# EAGLE board TEC (EAGLE 8.3.0)
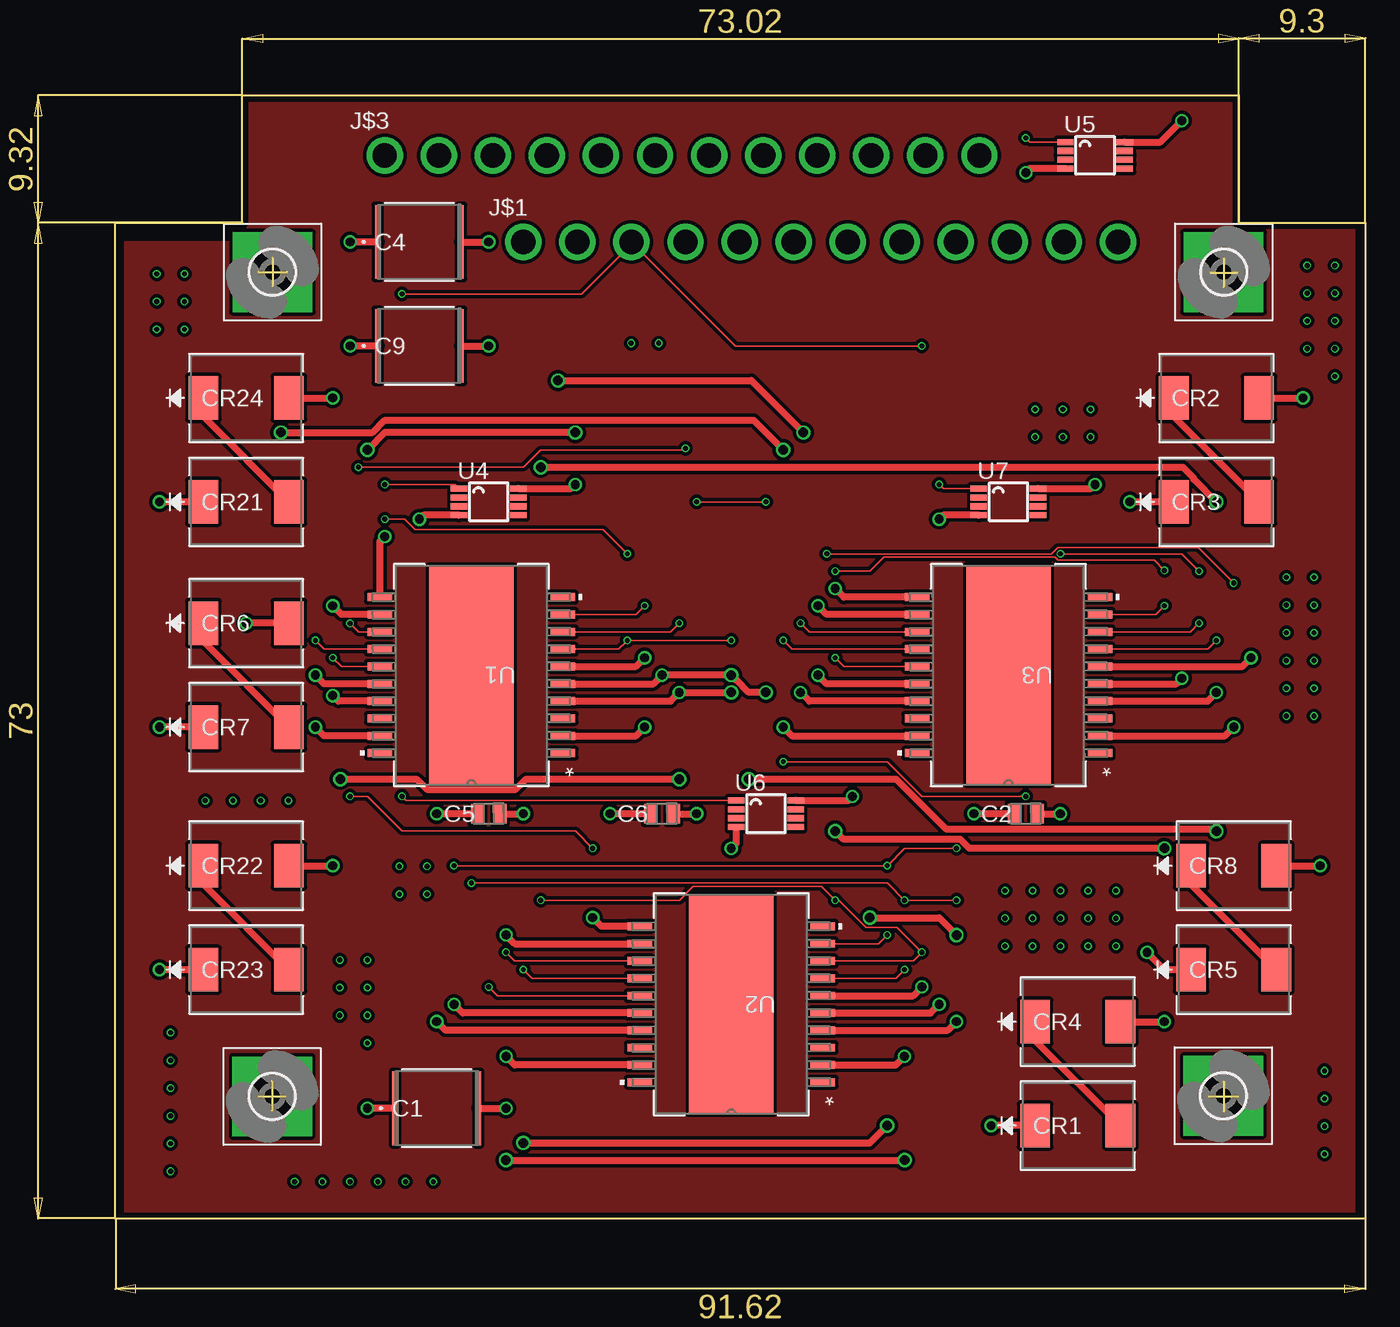
[diagram p0: board, top side]
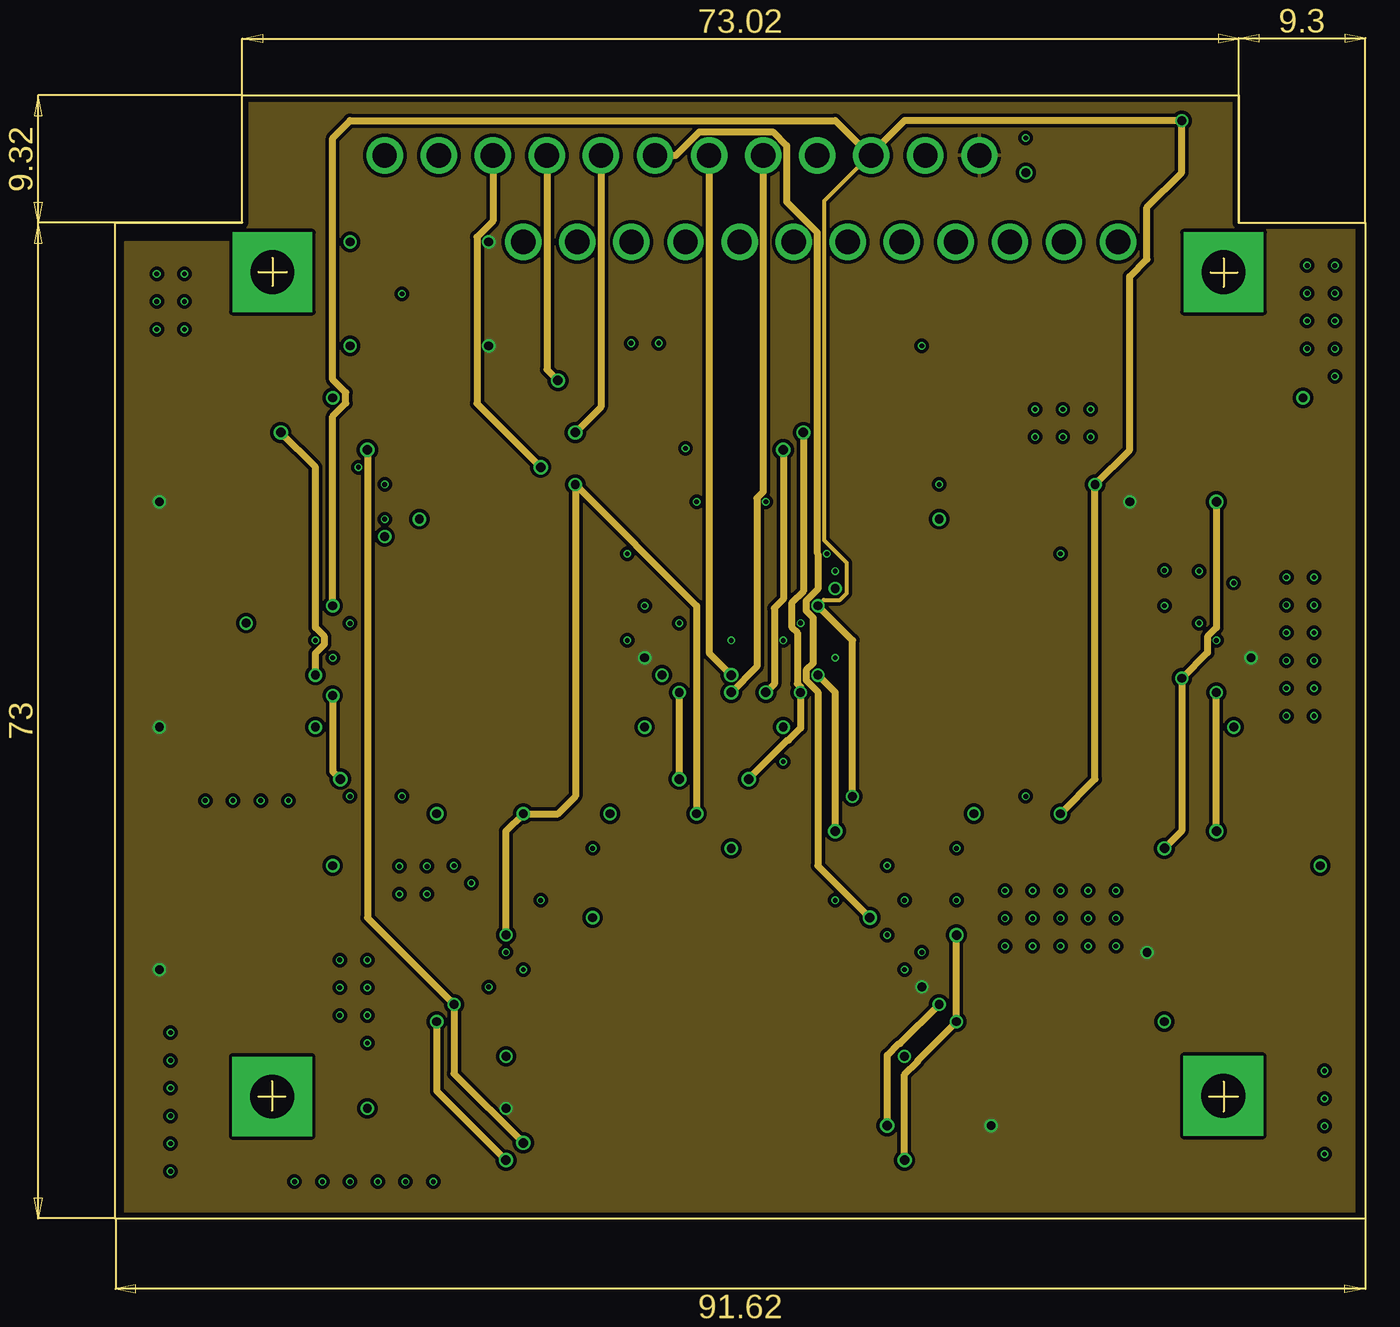
[diagram p1: board, inner layer Route2]
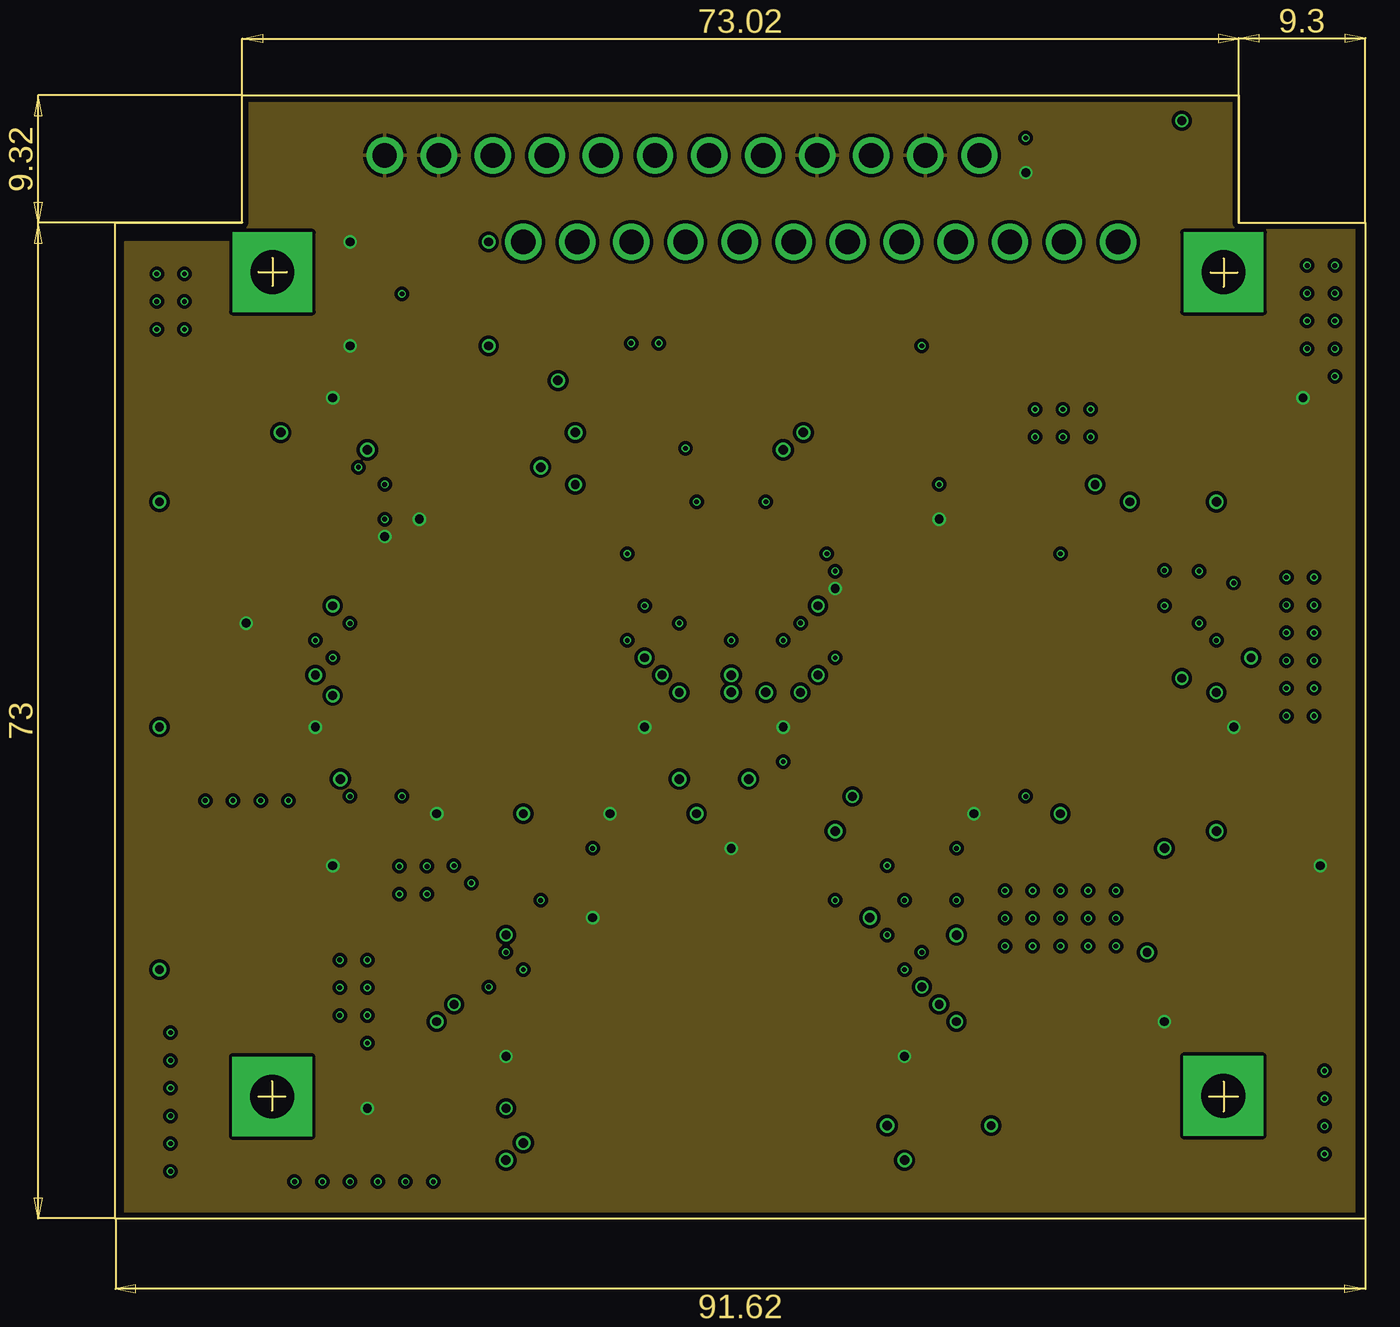
[diagram p2: board, inner layer Route15]
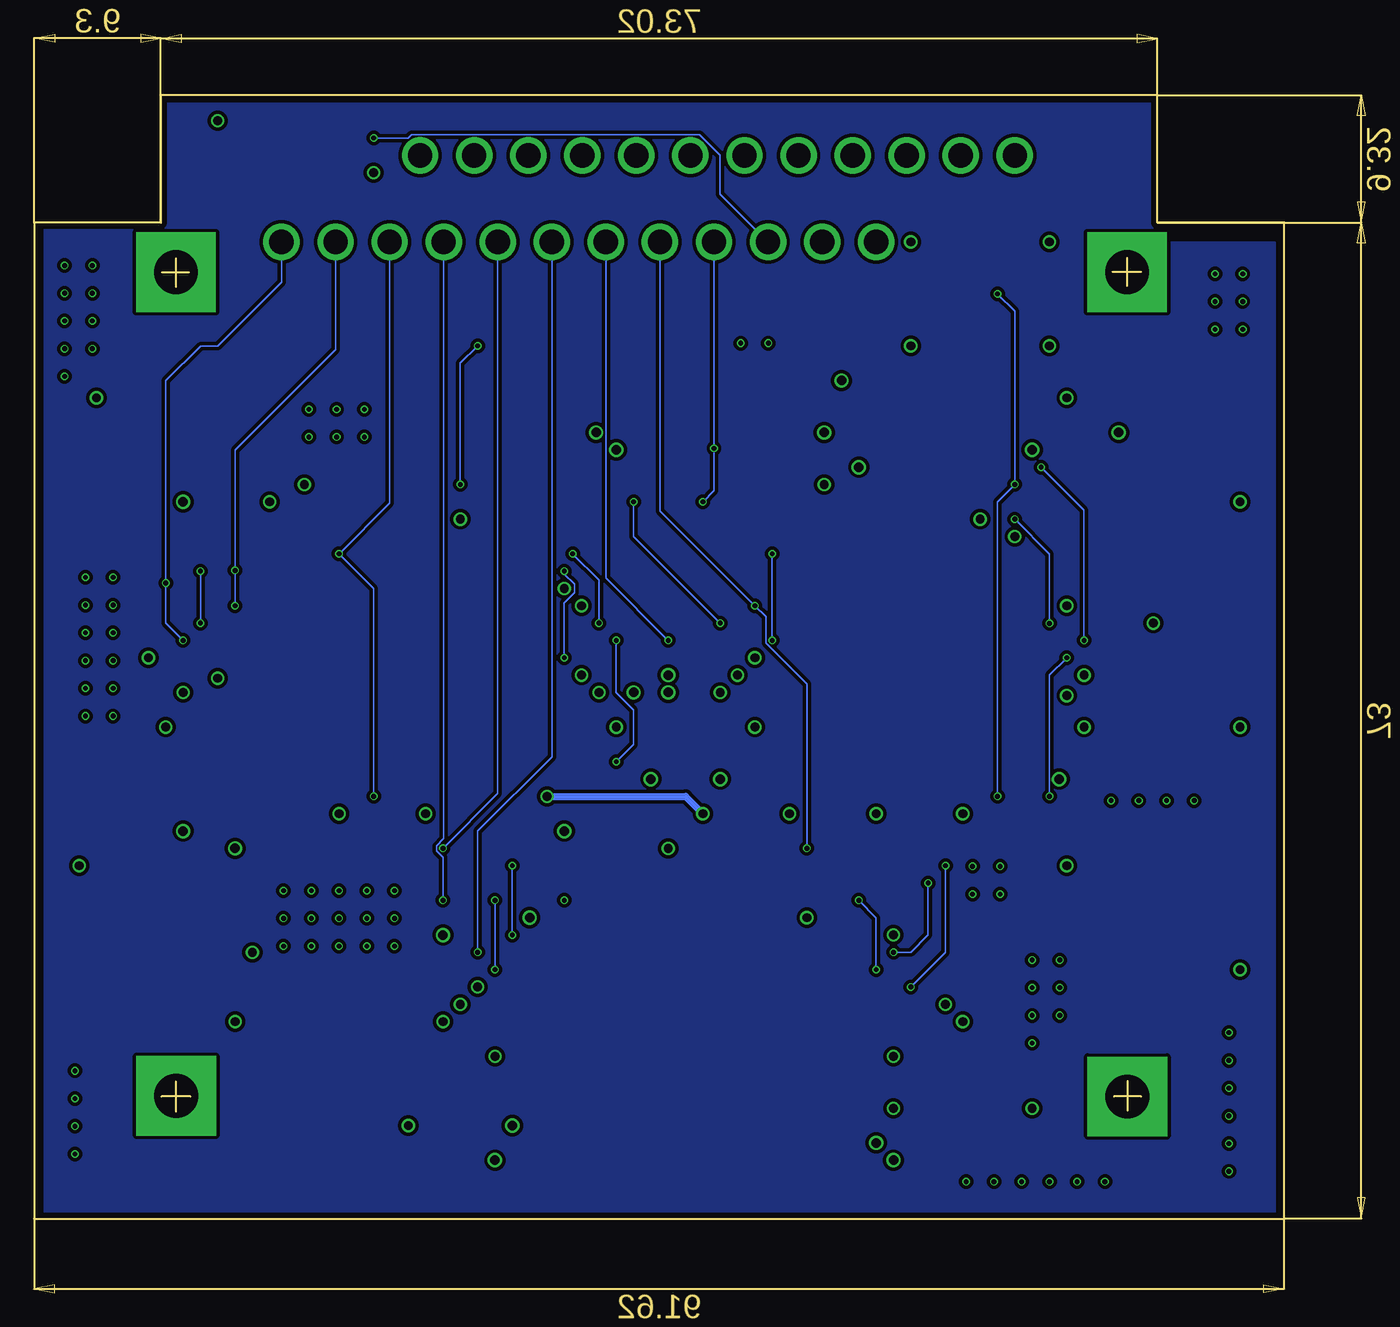
[diagram p3: board, bottom side, seen from below]

Size 91.64 x 82.35 mm. Coordinates in mm from the lower left corner, seen from the top.
Outline: 11.53,70.44 11.53,68.38
Outline: 10.49,69.39 12.6,69.39
Outline: 10.52,8.97 12.5,8.97
Outline: 11.51,10.08 11.51,7.93
Outline: 81.25,10.06 81.25,7.87
Outline: 80.19,8.97 82.3,8.97
Outline: 81.25,70.41 81.25,68.33
Outline: 80.29,69.37 82.27,69.37
Outline: 0,0.03 0,73.03 9.32,73.03 9.32,82.35 82.35,82.35 82.35,73 91.64,73 91.64,0 0.03,0 0,0.03
Copper layers (1*2*15*16): Top 0.035559375mm / dielectric 0.17018125mm / Route2 0.01778125mm / dielectric 47mil / Route15 0.01778125mm / dielectric 0.17018125mm / Bottom 0.035559375mm
Design rules "oshpark-4layer": minimum track width 5mil, minimum drill 10mil, track to track 5mil, track to pad 5mil, pad to pad 5mil, via to via 5mil, smd to smd 5mil, copper to edge 15mil, drill to drill 6mil, minimum pad ring 4mil, minimum via ring 4mil, stop-mask expansion 2.5mil, vias tented up to drill 0mil, thermal gap 10mil
Net classes: 1 power: width 0.254 mm; 2 gnd: width 0.305 mm, drill 0.406 mm, clearance 0.205 mm to class 0, clearance 0.205 mm to class 1, clearance 0.205 mm; 3 power usb: width 0.508 mm, drill 0.406 mm, clearance 0.205 mm to class 0, clearance 0.205 mm to class 1, clearance 0.205 mm to class 2, clearance 0.205 mm

## Footprints (pad centres in the part's own frame; a part is rotated, then mirrored left to right if it is on the bottom)
CAP_5750 = smd 0.406 x 5.41: 1 -3.048,0; 2 3.048,0
YAG_CC0805 = smd 0.965 x 1.448: 1 -0.826,0; 2 0.826,0
DIODE_400V_5A = smd 2.18 x 3.18: 1 -3.127,0; 2 3.127,0
3,2-PAD-SQUARE = drill 3.2 pad 5.842 square: B3,2 0,0
WIREWRAPPOST = drill 1.778 pad 2.54: 1 0,0; 2 3.962,0; 3 7.925,0; 4 11.887,0; 5 15.85,0; 6 19.812,0; 7 23.774,0; 8 27.737,0; 9 31.699,0; 10 35.662,0; 11 39.624,0; 12 43.586,0
POWERSO-20 = smd 1.803 x 0.584: 1 -6.706,5.715; 2 -6.706,4.445; 3 -6.706,3.175; 4 -6.706,1.905; 5 -6.706,0.635; 6 -6.706,-0.635; 7 -6.706,-1.905; 8 -6.706,-3.175; 9 -6.706,-4.445; 10 -6.706,-5.715; 11 6.706,-5.715; 12 6.706,-4.445; 13 6.706,-3.175; 14 6.706,-1.905; 15 6.706,-0.635; 16 6.706,0.635; 17 6.706,1.905; 18 6.706,3.175; 19 6.706,4.445; 20 6.706,5.715 | smd 6.198 x 16.002: 21 0,0
SOP65P500X110-8N = smd 1.2 x 0.45: 1 -2.175,0.975; 2 -2.175,0.325; 3 -2.175,-0.325; 4 -2.175,-0.975; 5 2.175,-0.975; 6 2.175,-0.325; 7 2.175,0.325; 8 2.175,0.975

## Placement (x,y rotation side)
C1  47uF  [CAP_5750]  23.57,8.1 0 top
C2  1uF  [YAG_CC0805]  66.75,29.69 0 top
C4  47uF  [CAP_5750]  22.3,71.6 0 top
C5  1uF  [YAG_CC0805]  27.38,29.69 0 top
C6  1uF  [YAG_CC0805]  40.08,29.69 0 top
C9  47uF  [CAP_5750]  22.3,63.98 0 top
CR1  DIODE_400V_5A  [DIODE_400V_5A]  70.56,6.83 0 top
CR2  DIODE_400V_5A  [DIODE_400V_5A]  80.72,60.17 0 top
CR3  DIODE_400V_5A  [DIODE_400V_5A]  80.72,52.55 0 top
CR4  DIODE_400V_5A  [DIODE_400V_5A]  70.56,14.45 0 top
CR5  DIODE_400V_5A  [DIODE_400V_5A]  81.99,18.26 0 top
CR6  DIODE_400V_5A  [DIODE_400V_5A]  9.6,43.66 0 top
CR7  DIODE_400V_5A  [DIODE_400V_5A]  9.6,36.04 0 top
CR8  DIODE_400V_5A  [DIODE_400V_5A]  81.99,25.88 0 top
CR21  DIODE_400V_5A  [DIODE_400V_5A]  9.6,52.55 0 top
CR22  DIODE_400V_5A  [DIODE_400V_5A]  9.6,25.88 0 top
CR23  DIODE_400V_5A  [DIODE_400V_5A]  9.6,18.26 0 top
CR24  DIODE_400V_5A  [DIODE_400V_5A]  9.6,60.17 0 top
H1  MOUNT-PAD-SQUARE3.2  [3,2-PAD-SQUARE]  11.53,69.39 0 top
H2  MOUNT-PAD-SQUARE3.2  [3,2-PAD-SQUARE]  11.51,8.97 0 top
H3  MOUNT-PAD-SQUARE3.2  [3,2-PAD-SQUARE]  81.25,69.39 0 top
H4  MOUNT-PAD-SQUARE3.2  [3,2-PAD-SQUARE]  81.23,9.02 0 top
J$1  WIREPOST  [WIREWRAPPOST]  29.92,71.6 0 top
J$3  WIREPOST  [WIREWRAPPOST]  19.76,77.95 0 top
U1  L298P013TR  [POWERSO-20]  26.11,39.85 180 top
U2  L298P013TR  [POWERSO-20]  45.16,15.72 180 top
U3  L298P013TR  [POWERSO-20]  65.48,39.85 180 top
U4  DS18B20U+T&R  [SOP65P500X110-8N]  27.38,52.55 0 top
U5  DS18B20U+T&R  [SOP65P500X110-8N]  71.83,77.95 0 top
U6  DS18B20U+T&R  [SOP65P500X110-8N]  47.7,29.69 0 top
U7  DS18B20U+T&R  [SOP65P500X110-8N]  65.48,52.55 0 top

## Library data of the parts
C1 C4 C9 = cubesat_; MANUFACTURER_PART_NUMBER: CGA9N3X7R1C476M230KB; VENDOR: TDK
C2 C5 C6 = cubesat_; MANUFACTURER_PART_NUMBER: CC0805KKX7R7BB105; VENDOR: Yageo
CR1-CR8 CR21-CR24 = cubesat_; MANUFACTURER_PART_NUMBER: S5GC13F; VENDOR: Diodes Inc
H1-H4 = holes
J$1 J$3 = cubesat
U1-U3 = cubesat_; MANUFACTURER_PART_NUMBER: L298P013TR; VENDOR: ST Microelectronics
U4-U7 = cubesat_; AVAILABILITY: Good; DESCRIPTION: Temp Sensor Digital Serial (1-Wire) 8-Pin uMAX T/R; MF: Maxim Integrated; MP: DS18B20U+T&amp;R; PACKAGE: MSOP-8 Maxim Integrated; PRICE: 2.79 USD

## Nets
5V: C2.2 C5.2 C6.2 J$3.10 U1.12 U2.12 U3.12 U4.8 U5.8 U6.8 U7.8
GND [gnd]: C1.1 C2.1 C4.1 C5.1 C6.1 C9.1 CR2.2 CR4.2 CR6.2 CR8.2 CR22.2 CR24.2 J$3.1 J$3.2 J$3.9 J$3.11 U1.2 U1.11 U1.19 U2.2 U2.11 U2.19 U3.2 U3.11 U3.19 U4.4 U5.4 U6.4 U7.4
N$1: CR1.2 CR4.1
N$2: CR2.1 CR3.2
N$5: CR5.2 CR8.1
N$6: CR6.1 CR7.2
N$113: CR21.2 CR24.1
N$114: CR22.1 CR23.2
TEC1_ENABLE: J$1.4 U1.8 U1.14
TEC1_INPUT1: J$1.6 U1.7 U1.13
TEC1_INPUT2: J$1.5 U1.9 U1.15
TEC1_OUT1: J$3.8 U1.4 U1.17
TEC1_OUT2: J$3.7 U1.5 U1.16
TEC2_ENABLE: J$1.7 U2.8 U2.14
TEC2_INPUT1: J$1.9 U2.7 U2.13
TEC2_INPUT2: J$1.8 U2.9 U2.15
TEC2_OUT1: J$3.6 U2.4 U2.17
TEC2_OUT2: J$3.5 U2.5 U2.16
TEC3_ENABLE: J$1.10 U3.8 U3.14
TEC3_INPUT1: J$1.12 U3.7 U3.13
TEC3_INPUT2: J$1.11 U3.9 U3.15
TEC3_OUT1: J$3.4 U3.4 U3.17
TEC3_OUT2: J$3.3 U3.5 U3.16
TEMP: J$1.3 U4.1 U5.1 U6.1 U7.1
VIN [power]: C1.2 C4.2 C9.2 CR1.1 CR3.1 CR5.1 CR7.1 CR21.1 CR23.1 J$3.12 U1.6 U2.6 U3.6

## Tracks (layer width: path | path; a pad name or v marks a point on that pad's centre or on a via)
5V  (via drill 0.65)
  Top 0.508: C5.2 v29.92,29.69 | C6.2 v42.62,29.69 | C2.2 v69.29,29.69 | U3.12 52.15,44.3 v51.51,44.93 | U2.12 29.29,20.17 v28.65,20.8 | U1.12 16.59,44.3 v15.95,44.93 | U6.8 53.76,30.67 v54.05,30.96 | U7.8 71.54,53.53 v71.83,53.82 | U4.8 33.44,53.53 v33.73,53.82 | U5.8 76.62,78.93 v78.18,80.49
  Route2 0.305: v51.51,44.93 51.94,45.36 53.13,45.36 53.63,45.85 53.63,48.07 51.98,49.72 51.98,74.61 55.32,77.95
  Route2 0.508: v28.65,20.8 28.65,28.42 v29.92,29.69 32.46,29.69 33.73,30.96 v33.73,53.82 42.62,44.93 v42.62,29.69 | v54.05,30.96 54.05,42.39 v51.51,44.93 | v69.29,29.69 71.83,32.23 v71.83,53.82 74.37,56.36 74.37,69.06 75.64,70.33 75.64,74.14 78.18,76.68 v78.18,80.49 57.86,80.49 55.32,77.95 | 55.32,77.95 J$3.10 | v15.95,44.93 15.95,58.83 16.9,59.78 16.9,60.56 15.95,61.51 15.95,79.22 17.22,80.49 52.78,80.49 55.32,77.95
  Bottom 0.508: v54.05,30.96 43.89,30.96 v42.62,29.69
GND  (via drill 0.65)
  Top 0.508: C4.1 v17.22,71.6 | C9.1 v17.22,63.98 | CR24.2 v15.95,60.17 | CR6.2 v9.6,43.66 | CR22.2 v15.95,25.88 | C5.1 v23.57,29.69 | C6.1 v36.27,29.69 | C2.1 v62.94,29.69 | CR8.2 v88.34,25.88 | CR4.2 v76.91,14.45 | C1.1 v18.49,8.1 | CR2.2 v87.07,60.17 | U3.2 81.36,35.41 v81.99,36.04 | U3.19 49.61,35.41 v48.97,36.04 | U3.11 53.42,45.57 v52.78,46.2 | U2.19 29.29,11.28 v28.65,11.91 | U2.11 35.64,21.44 v35,22.07 | U2.2 57.23,11.28 v57.86,11.91 | U1.11 19.41,49.66 v19.76,50.01 | U1.19 15.32,35.41 v14.68,36.04 | U1.2 38.18,35.41 v38.81,36.04 | U6.4 45.53,27.52 v45.16,27.15 | U7.4 60.7,51.58 v60.4,51.28 | U4.4 22.6,51.58 v22.3,51.28 | U5.4 67.05,76.98 v66.75,76.68
  pour Route15 (isolate 0.254): 9.6,71.6 0.71,71.6 0.71,0.48 90.88,0.48 90.88,72.87 81.99,72.87 81.99,81.76 9.6,81.76
N$1
  Top 0.508: CR4.1 67.43,13.09 CR1.2
N$2
  Top 0.508: CR2.1 77.59,58.81 CR3.2
N$3
  pour Top (isolate 0.254): 0.71,0.48 90.88,0.48 90.88,72.87 81.99,72.87 81.99,81.76 9.6,81.76 9.6,71.6 0.71,71.6
N$4
  pour Bottom (isolate 0.254): 0.71,0.48 90.88,0.48 90.88,72.87 81.99,72.87 81.99,81.76 9.6,81.76 9.6,71.6 0.71,71.6
N$5
  Top 0.508: CR8.1 78.86,24.52 CR5.2
N$6
  Top 0.508: CR6.1 6.47,42.3 CR7.2
N$10  (via drill 0.35)
  other vias: 67.44,57.3
N$11  (via drill 0.35)
  other vias: 67.44,59.33
N$12  (via drill 0.35)
  other vias: 85.85,36.86
N$13  (via drill 0.35)
  other vias: 85.85,38.89
N$14  (via drill 0.35)
  other vias: 85.85,40.92
N$15  (via drill 0.35)
  other vias: 85.85,42.95
N$16  (via drill 0.35)
  other vias: 85.85,44.98
N$17  (via drill 0.35)
  other vias: 85.85,47.02
N$18  (via drill 0.35)
  other vias: 69.47,57.3
N$19  (via drill 0.35)
  other vias: 69.47,59.33
N$20  (via drill 0.35)
  other vias: 87.88,36.86
N$21  (via drill 0.35)
  other vias: 87.88,38.89
N$22  (via drill 0.35)
  other vias: 87.88,40.92
N$23  (via drill 0.35)
  other vias: 87.88,42.95
N$24  (via drill 0.35)
  other vias: 87.88,44.98
N$25  (via drill 0.35)
  other vias: 87.88,47.02
N$26  (via drill 0.35)
  other vias: 71.5,57.3
N$27  (via drill 0.35)
  other vias: 71.5,59.33
N$30  (via drill 0.35)
  other vias: 87.38,63.78
N$31  (via drill 0.35)
  other vias: 87.38,65.81
N$32  (via drill 0.35)
  other vias: 87.38,67.84
N$33  (via drill 0.35)
  other vias: 87.38,69.88
N$37  (via drill 0.35)
  other vias: 89.41,61.75
N$38  (via drill 0.35)
  other vias: 89.41,63.78
N$39  (via drill 0.35)
  other vias: 89.41,65.81
N$40  (via drill 0.35)
  other vias: 89.41,67.84
N$42  (via drill 0.35)
  other vias: 89.41,69.88
N$43  (via drill 0.35)
  other vias: 6.6,30.66
N$44  (via drill 0.35)
  other vias: 4.06,3.48
N$45  (via drill 0.35)
  other vias: 4.06,5.51
N$48  (via drill 0.35)
  other vias: 4.06,7.54
N$49  (via drill 0.35)
  other vias: 4.06,9.58
N$50  (via drill 0.35)
  other vias: 4.06,11.61
N$51  (via drill 0.35)
  other vias: 4.06,13.64
N$53  (via drill 0.35)
  other vias: 8.64,30.66
N$54  (via drill 0.35)
  other vias: 88.65,4.75
N$55  (via drill 0.35)
  other vias: 88.65,6.78
N$56  (via drill 0.35)
  other vias: 88.65,8.81
N$57  (via drill 0.35)
  other vias: 88.65,10.85
N$61  (via drill 0.35)
  other vias: 10.67,30.66
N$62  (via drill 0.35)
  other vias: 37.82,64.19
N$63  (via drill 0.35)
  other vias: 3.05,65.2
N$64  (via drill 0.35)
  other vias: 3.05,67.23
N$65  (via drill 0.35)
  other vias: 3.05,69.27
N$67  (via drill 0.35)
  other vias: 20.83,23.8
N$68  (via drill 0.35)
  other vias: 20.83,25.83
N$69  (via drill 0.35)
  other vias: 12.7,30.66
N$70  (via drill 0.35)
  other vias: 39.85,64.19
N$71  (via drill 0.35)
  other vias: 5.08,65.2
N$72  (via drill 0.35)
  other vias: 5.08,67.23
N$73  (via drill 0.35)
  other vias: 5.08,69.27
N$75  (via drill 0.35)
  other vias: 22.86,23.8
N$76  (via drill 0.35)
  other vias: 22.86,25.83
N$77  (via drill 0.35)
  other vias: 18.49,12.88
N$79  (via drill 0.35)
  other vias: 23.32,2.72
N$80  (via drill 0.35)
  other vias: 21.29,2.72
N$81  (via drill 0.35)
  other vias: 19.25,2.72
N$82  (via drill 0.35)
  other vias: 17.22,2.72
N$83  (via drill 0.35)
  other vias: 15.19,2.72
N$84  (via drill 0.35)
  other vias: 13.16,2.72
N$85  (via drill 0.35)
  other vias: 18.49,14.91
N$86  (via drill 0.35)
  other vias: 16.46,14.91
N$88  (via drill 0.35)
  other vias: 73.35,19.99
N$89  (via drill 0.35)
  other vias: 71.32,19.99
N$90  (via drill 0.35)
  other vias: 69.29,19.99
N$91  (via drill 0.35)
  other vias: 67.26,19.99
N$92  (via drill 0.35)
  other vias: 65.23,19.99
N$93  (via drill 0.35)
  other vias: 18.49,16.94
N$94  (via drill 0.35)
  other vias: 16.46,16.94
N$96  (via drill 0.35)
  other vias: 73.35,22.02
N$97  (via drill 0.35)
  other vias: 71.32,22.02
N$98  (via drill 0.35)
  other vias: 69.29,22.02
N$99  (via drill 0.35)
  other vias: 67.26,22.02
N$100  (via drill 0.35)
  other vias: 65.23,22.02
N$101  (via drill 0.35)
  other vias: 18.49,18.97
N$102  (via drill 0.35)
  other vias: 16.46,18.97
N$104  (via drill 0.35)
  other vias: 73.35,24.05
N$105  (via drill 0.35)
  other vias: 71.32,24.05
N$106  (via drill 0.35)
  other vias: 69.29,24.05
N$107  (via drill 0.35)
  other vias: 67.26,24.05
N$108  (via drill 0.35)
  other vias: 65.23,24.05
N$113
  Top 0.508: CR24.1 6.47,58.81 CR21.2
N$114
  Top 0.508: CR22.1 6.47,24.52 CR23.2
TEC1_ENABLE  (via drill 0.35)
  Top 0.127: U1.14 15.32,41.76 v14.68,42.39 | U1.8 40.72,43.03 v41.35,43.66 | v42.62,52.55 v47.7,52.55 | v17.83,55.09 29.92,55.09 31.19,56.36 41.7,56.36 v41.81,56.47
  Bottom 0.127: J$1.4 v41.81,56.47 41.81,53.37 v42.62,52.55 | v47.7,52.55 47.7,50.01 v41.35,43.66 | v14.68,42.39 14.68,51.94 v17.83,55.09
TEC1_INPUT1  (via drill 0.35)
  Top 0.127: U1.13 17.83,43.03 v17.22,43.64 | U1.7 36.91,41.76 37.4,42.25 | 37.4,42.25 v37.54,42.39 | v45.16,42.39 v37.54,42.39 | v37.54,42.39 37.4,42.25 | v19.76,51.28 21.23,51.28 21.99,50.53 35.76,50.53 v37.54,48.74
  Bottom 0.127: 17.22,43.66 v17.22,43.64 17.22,48.74 v19.76,51.28 | J$1.6 49.73,46.97 v45.16,42.39 | v37.54,48.74 v37.54,42.39
TEC1_INPUT2  (via drill 0.35)
  Top 0.127: U1.15 16.59,40.49 v15.95,41.12 | U1.9 38.18,44.3 v38.81,44.93 | v17.22,30.96 18.49,30.96 21.03,28.42 33.73,28.42 v35,27.15
  Bottom 0.127: J$1.5 45.77,51.89 v38.81,44.93 38.01,44.13 38.01,42.2 35,39.19 v35,27.15 | v15.95,41.12 17.22,39.85 v17.22,30.96
TEC1_OUT1  (via drill 0.65, 0.7)
  Top 0.508: U1.17 16.35,37.95 v15.95,38.35 | U1.4 40.72,37.95 v41.35,38.58 v45.16,38.58 | v16.51,32.23 22.09,32.23 22.85,31.47 29.37,31.47 30.13,32.23 v41.35,32.23
  Route2 0.508: J$3.8 47.5,53.28 47.04,52.83 47.04,40.47 v45.16,38.58 | v15.95,38.35 15.95,32.79 v16.51,32.23 | v41.35,32.23 v41.35,38.58
TEC1_OUT2  (via drill 0.65, 0.7)
  Top 0.508: U1.16 15.32,39.22 v14.68,39.85 | U1.5 39.45,39.22 v40.08,39.85 v40.09,39.86 v45.16,39.86 45.53,39.49 45.54,39.49 46.44,38.58 v47.7,38.58 | v12.14,57.63 18.86,57.63 19.77,58.54 46.8,58.54 v48.97,56.36
  Route2 0.508: J$3.7 43.53,41.48 v45.16,39.86 | v12.14,57.63 14.68,55.09 14.68,43.32 15.34,42.67 15.34,42.12 14.68,41.46 v14.68,39.85 | v48.97,56.36 48.97,45.42 48.31,44.76 48.31,39.19 v47.7,38.58
TEC2_ENABLE  (via drill 0.35)
  Top 0.127: U2.8 58.5,18.9 v59.13,19.53 57.31,21.36 55.03,21.36 53.04,23.34 v52.78,23.34 51.77,24.36 42.37,24.36 41.35,23.34 v31.19,23.34 | U2.14 30.56,17.63 v29.92,18.26
  Bottom 0.127: J$1.7 53.7,33.86 59.13,28.42 v59.13,19.53 | v29.92,18.26 29.92,22.07 v31.19,23.34
TEC2_INPUT1  (via drill 0.35)
  Top 0.127: U2.7 57.23,17.63 v57.86,18.26 | U2.13 29.29,18.9 v28.65,19.53 | v61.67,23.34 v57.86,23.34 56.59,24.61 v26.11,24.61
  Bottom 0.127: J$1.9 61.62,27.86 62.14,27.35 62.14,26.96 61.67,26.49 v61.67,23.34 | v57.86,23.34 v57.86,18.26 | v28.65,19.53 27.38,19.53 26.11,20.8 v26.11,24.61
TEC2_INPUT2  (via drill 0.35)
  Top 0.127: U2.9 55.96,20.17 v56.59,20.8 | U2.15 28.02,16.36 v27.38,16.99 | v61.67,27.15 57.86,27.15 v56.59,25.88 v24.84,25.88
  Bottom 0.127: J$1.8 57.66,31.17 v61.67,27.15 | v56.59,25.88 v56.59,20.8 | v27.38,16.99 24.84,19.53 v24.84,25.88
TEC2_OUT1  (via drill 0.65, 0.7)
  Top 0.508: U2.17 24.21,13.82 v23.57,14.45 | U2.4 61.04,13.82 v61.67,14.45 | v55.32,22.07 60.4,22.07 v61.67,20.8 | v28.65,4.29 v57.86,4.29
  Route2 0.508: J$3.6 41.11,77.95 42.83,79.67 48.21,79.67 49.21,78.66 49.21,74.55 51.45,72.31 51.45,48.81 51.51,48.74 51.51,46.16 50.64,45.29 50.64,44.57 51.15,44.06 51.15,40.72 50.64,40.21 50.64,39.49 51.51,38.62 51.51,25.88 v55.32,22.07 | v61.67,20.8 v61.67,14.45 58.81,11.59 58.81,11.52 57.86,10.57 v57.86,4.29 | v23.57,14.45 23.57,9.37 v28.65,4.29
TEC2_OUT2  (via drill 0.65, 0.7)
  Top 0.508: U2.16 25.48,15.09 v24.84,15.72 | U2.5 59.77,15.09 v60.4,15.72 | v33.73,57.63 19.76,57.63 v18.49,56.36 | v29.92,5.56 55.32,5.56 v56.59,6.83
  Route2 0.508: J$3.5 35.61,59.51 v33.73,57.63 | v18.49,56.36 18.49,22.07 v24.84,15.72 24.84,10.64 v29.92,5.56 | v60.4,15.72 57.54,12.86 57.47,12.86 56.59,11.98 v56.59,6.83
TEC3_ENABLE  (via drill 0.35)
  Top 0.127: U3.8 78.82,43.03 v79.45,43.66 | U3.14 49.61,41.76 v48.97,42.39 | v69.29,48.74 78.18,48.74 v79.45,47.47 | v48.97,33.5 56.59,33.5 59.13,30.96 v66.75,30.96
  Bottom 0.127: J$1.10 65.58,52.45 v69.29,48.74 66.75,46.2 v66.75,30.96 | v79.45,47.47 v79.45,43.66 | v48.97,42.39 48.97,38.58 47.7,37.31 47.7,34.77 v48.97,33.5
TEC3_INPUT1  (via drill 0.35)
  Top 0.127: U3.7 80.09,41.76 v80.72,42.39 | U3.13 50.88,43.03 v50.24,43.66 | v52.17,48.74 68.63,48.74 69.1,49.21 79.38,49.21 v81.99,46.6
  Bottom 0.127: J$1.12 73.51,68.66 78.18,63.98 79.45,63.98 81.99,61.44 v81.99,46.6 81.99,43.66 v80.72,42.39 | v50.24,43.66 50.24,46.81 v52.17,48.74
TEC3_INPUT2  (via drill 0.35)
  Top 0.127: U3.9 76.28,44.3 v76.91,44.93 | U3.15 53.42,40.49 v52.78,41.12 | v52.78,47.47 55.32,47.47 56.34,48.49 68.88,48.49 69.1,48.28 76.16,48.28 v76.91,47.53
  Bottom 0.127: J$1.11 69.55,63.73 76.91,56.36 v76.91,47.53 v76.91,44.93 | v52.78,41.12 52.78,45.13 52.03,45.89 52.03,46.52 52.78,47.27 v52.78,47.47
TEC3_OUT1  (via drill 0.65, 0.7)
  Top 0.508: U3.4 80.09,37.95 v80.72,38.58 | U3.17 50.88,37.95 v50.24,38.58 | v32.46,61.44 46.64,61.44 v50.45,57.63 | v80.72,28.42 80.56,28.59 60.88,28.59 57.23,32.23 v46.43,32.23
  Route2 0.508: J$3.4 31.65,62.26 v32.46,61.44 | v50.45,57.63 50.45,46 49.58,45.13 49.58,43.39 50.01,42.97 50.01,39.23 50.24,39 v50.24,38.58 50.24,35.97 49.36,35.1 49.3,35.1 v46.43,32.23 | v80.72,28.42 v80.72,38.58
TEC3_OUT2  (via drill 0.65, 0.7)
  Top 0.508: U3.16 52.15,39.22 v51.51,39.85 | U3.5 77.78,39.22 v78.18,39.62 | v80.72,52.55 79.06,54.21 79.06,54.3 78.27,55.09 v31.19,55.09 | v76.91,27.15 62.6,27.15 61.94,27.81 53.39,27.81 v52.78,28.42
  Route2 0.508: J$3.3 27.69,73.14 26.51,71.96 26.51,59.77 v31.19,55.09 | v80.72,52.55 80.72,43.32 80.06,42.67 80.06,41.5 v78.18,39.62 78.18,28.42 v76.91,27.15 | v52.78,28.42 52.78,38.58 v51.51,39.85
TEMP  (via drill 0.35)
  Top 0.127: U6.1 21.33,30.67 v21.03,30.96 | v19.76,53.82 24.91,53.82 U4.1 | U7.1 60.7,53.53 v60.4,53.82 | v59.13,63.98 45.47,63.98 37.92,71.53 | 37.92,71.53 J$1.3 | U5.1 67.05,78.93 v66.75,79.22 | v21.03,67.79 34.18,67.79 37.92,71.53
  Bottom 0.127: v21.03,30.96 21.03,52.55 v19.76,53.82 19.76,66.52 v21.03,67.79 | v60.4,53.82 60.4,62.71 v59.13,63.98 | v66.75,79.22 64.23,79.22 63.98,79.48 42.88,79.48 41.35,77.95 41.35,75.11 J$1.3
VIN  (via drill 0.65)
  Top 0.508: C9.2 v27.38,63.98 | C4.2 v27.38,71.6 | CR21.1 v3.25,52.55 | CR7.1 v3.25,36.04 | CR23.1 v3.25,18.26 | CR5.1 76.91,18.26 v75.64,19.53 | CR1.1 v64.21,6.83 | C1.2 v28.65,8.1 | CR3.1 v74.37,52.55 | U3.6 82.63,40.49 v83.26,41.12 | U2.6 58.5,16.36 v59.13,16.99 | U1.6 38.18,40.49 v38.81,41.12
  pour Route2 (isolate 0.254): 0.71,0.48 90.88,0.48 90.88,72.87 81.99,72.87 81.99,81.76 9.6,81.76 9.6,71.6 0.71,71.6